# EAGLE board Wifi Gas Sensor (EAGLE 8.6.1)
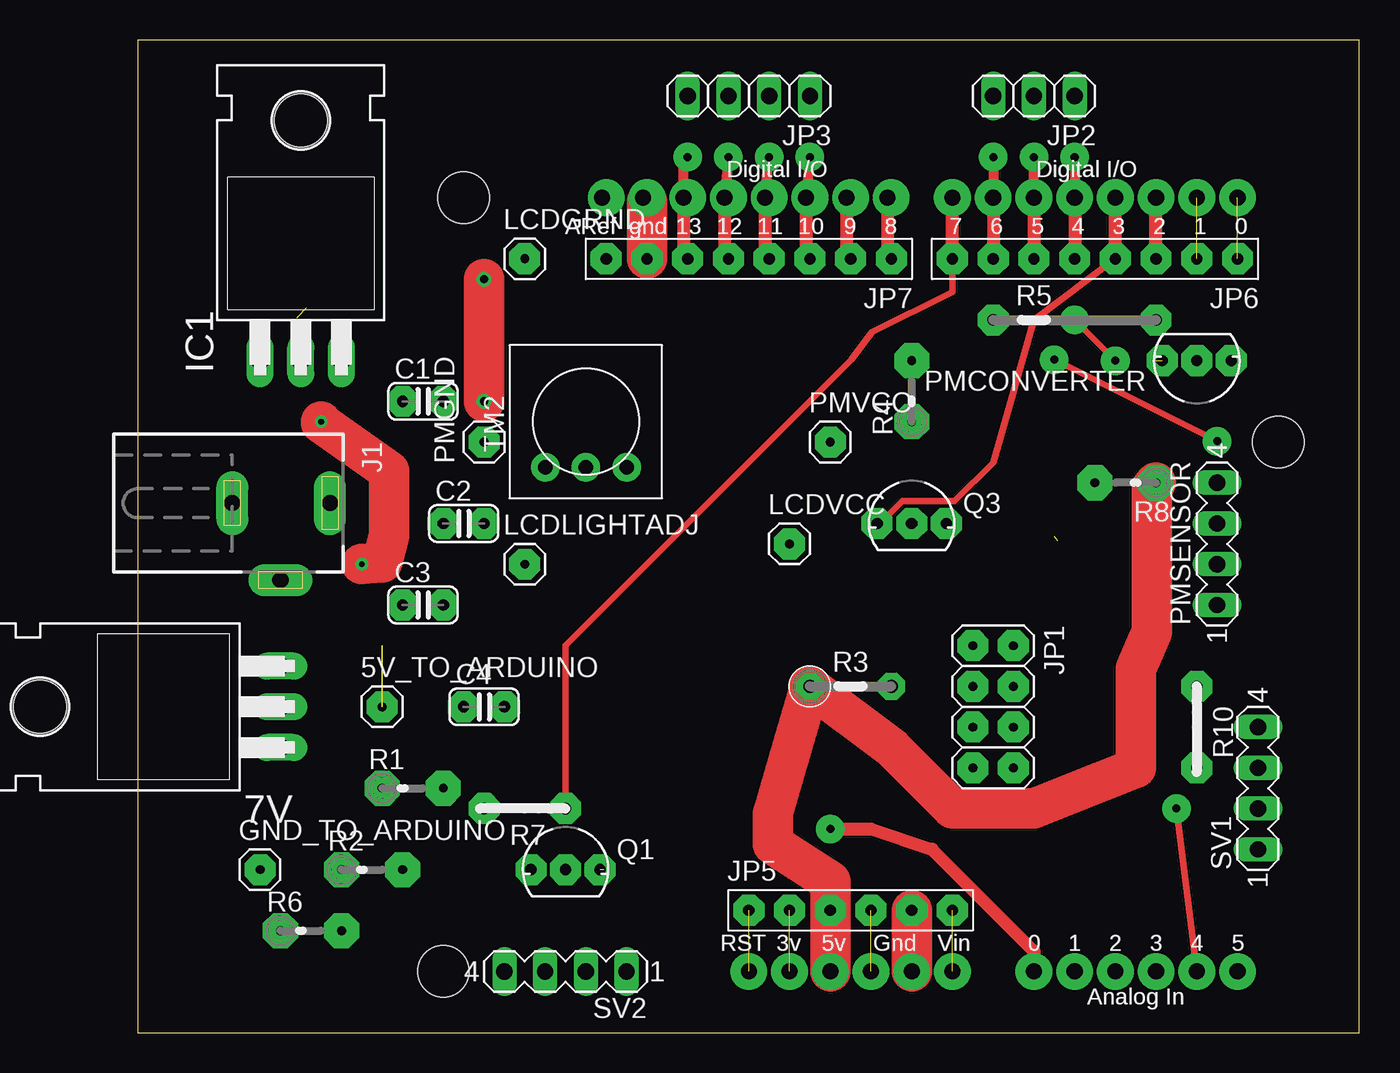
[diagram p0: board, top side]
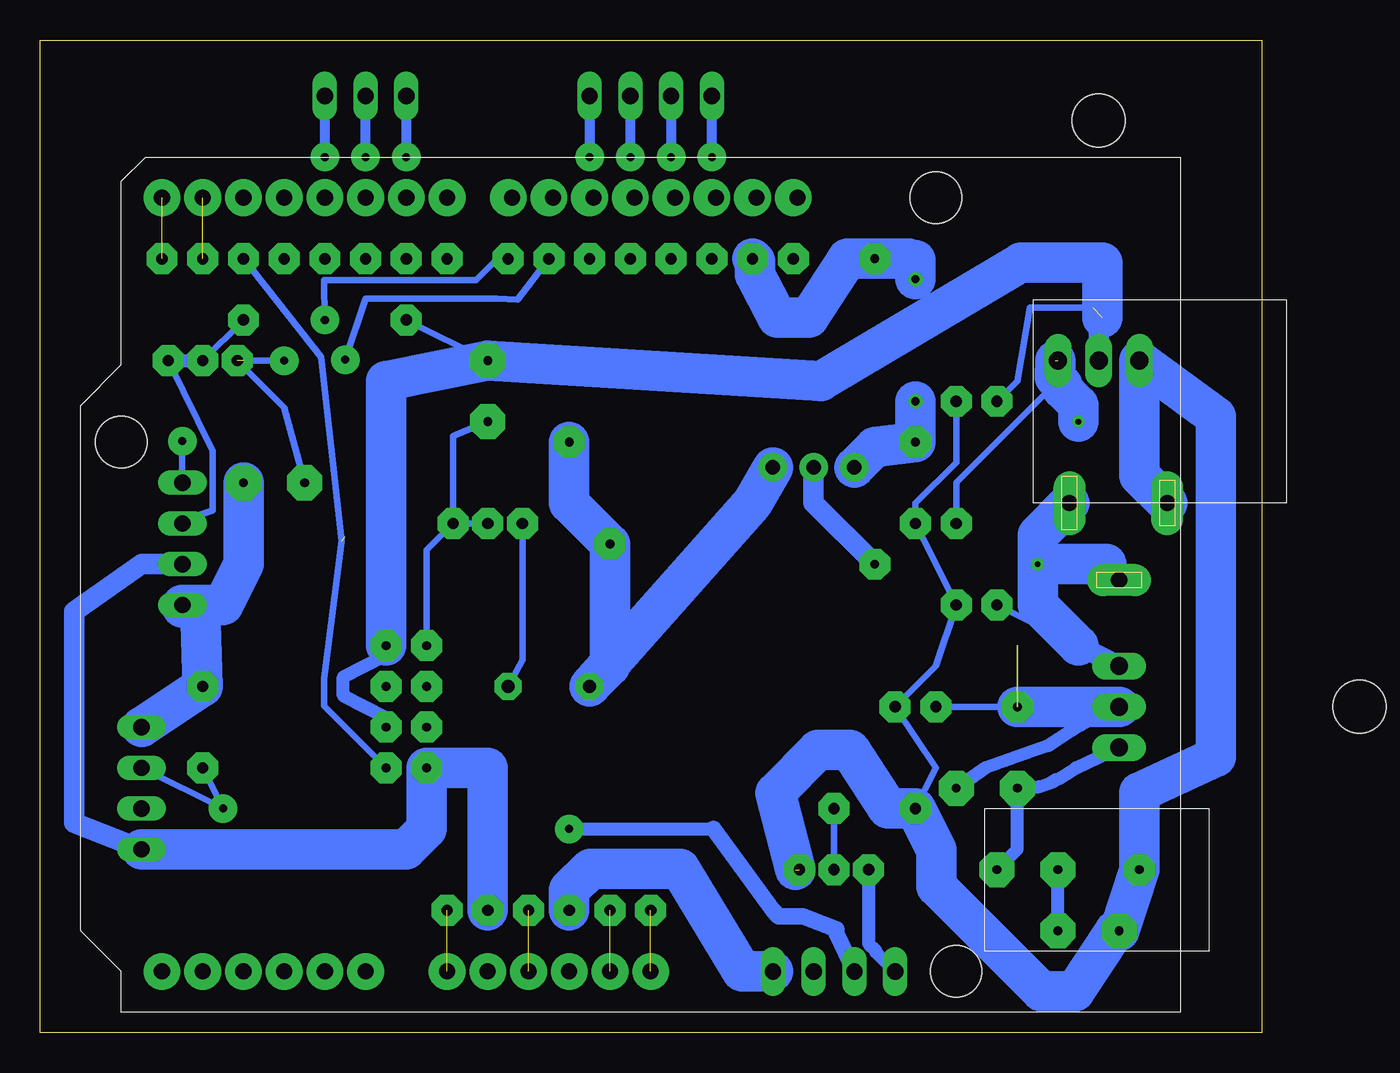
[diagram p1: board, bottom side, seen from below]

Size 76.18 x 61.9 mm. Coordinates in mm from the lower left corner, seen from the top.
Outline: 0,0 76.18,0 76.18,61.9 0,61.9 0,0
Copper layers (1*16): Top 0.035mm / dielectric 1.5mm / Bottom 0.035mm
Design rules "default": minimum track width 6mil, minimum drill 0.35mm, track to track 6mil, track to pad 6mil, pad to pad 6mil, via to via 6mil, smd to smd 6mil, copper to edge 40mil, drill to drill 6mil, minimum pad ring 10mil, minimum via ring 8mil, stop-mask expansion 4mil, vias tented up to drill 0mil, thermal gap 10mil

## Footprints (pad centres in the part's own frame; a part is rotated, then mirrored left to right if it is on the bottom)
1X01 = drill 0.55 pad 1.93 octagon: 1 0,0
TO220H = drill 1.118 long: 1 -2.54,-10.16; 2 0,-10.16; 3 2.54,-10.16 | hole 3.302: 0,4.826
C025-024X044 = drill 0.7 pad 1.93 octagon: 1 -1.27,0; 2 1.27,0
DCJ0202 = drill 1 pad 2 long: 1 0,3.1; 2 4.8,0; 3 0,-3
2X04 = drill 0.55 pad 1.93 octagon: 1 -3.81,-1.27; 2 -3.81,1.27; 3 -1.27,-1.27; 4 -1.27,1.27; 5 1.27,-1.27; 6 1.27,1.27; 7 3.81,-1.27; 8 3.81,1.27
1X03 = drill 1.016 long: 1 -2.54,0; 2 0,0; 3 2.54,0
1X04 = drill 1.016 long: 1 -3.81,0; 2 -1.27,0; 3 1.27,0; 4 3.81,0
1X06-BIG = drill 0.7 pad 1.93 octagon: 1 -6.35,0; 2 -3.81,0; 3 -1.27,0; 4 1.27,0; 5 3.81,0; 6 6.35,0
1X08-BIG = drill 0.7 pad 1.93 octagon: 1 -8.89,0; 2 -6.35,0; 3 -3.81,0; 4 -1.27,0; 5 1.27,0; 6 3.81,0; 7 6.35,0; 8 8.89,0
TO92-INLINE = drill 0.7 pad 1.93 octagon: 1 -2.159,0; 2 0,0; 3 2.159,0
MA04-1 = drill 1.016 long: 1 -3.81,0; 2 -1.27,0; 3 1.27,0; 4 3.81,0
0204V = drill 0.55 pad 2.184 octagon: 1 -1.27,0; 2 2.54,0
0207/5V = drill 0.813 pad 1.676 octagon: 1 -2.54,0; 2 2.54,0
0207/5V' = drill 0.7 pad 1.93 octagon: 1 -2.54,0; 2 7.62,0
0207/2V = drill 0.7 pad 1.93 octagon: 1 -1.27,0; 2 3.81,0
TRIM-3386 = drill 0.9 pad 1.778: 1 -2.54,-2.857; 2 0,-2.857; 3 2.54,-2.857
ADAFRUITUSER_ARDUINO-BPLACE = drill 1 pad 1.676 octagon: 3V 35.56,2.54; 5V 38.1,2.54; A0 50.8,2.54; A1 53.34,2.54; A2 55.88,2.54; A3 58.42,2.54; A4 60.96,2.54; A5 63.5,2.54; AREF 23.876,50.8; D0 63.5,50.8; D1 60.96,50.8; D2 58.42,50.8; D3 55.88,50.8; D4 53.34,50.8; D5 50.8,50.8; D6 48.26,50.8; D7 45.72,50.8; D8 41.656,50.8; D9 39.116,50.8; D10 36.576,50.8; D11 34.036,50.8; D12 31.496,50.8; D13 28.956,50.8; GND 26.416,50.8; GND1 43.18,2.54; GND2 40.64,2.54; RESET 33.02,2.54; VIN 45.72,2.54 | hole 3.2: 15.24,50.8; 66.04,35.56; 13.97,2.54; 15.24,50.8; 66.04,35.56; 13.97,2.54

## Placement (x,y rotation side)
5V_TO_ARDUINO  [1X01]  15.24,20.32 0 top
7V  317T  [TO220H]  -1.27,20.32 90 top
C1  [C025-024X044]  17.78,39.37 0 top
C2  [C025-024X044]  20.32,31.75 0 top
C3  [C025-024X044]  17.78,26.67 0 top
C4  [C025-024X044]  21.59,20.32 0 top
GND_TO_ARDUINO  [1X01]  7.62,10.16 0 top
IC1  7805T  [TO220H]  10.16,52.07 0 top
J1  DCJ0202  [DCJ0202]  8.89,33.02 270 top
JP1  [2X04]  53.34,20.32 270 top
JP2  [1X03]  55.88,58.42 180 top
JP3  [1X04]  38.1,58.42 180 top
JP5  [1X06-BIG]  44.45,7.62 0 top
JP6  [1X08-BIG]  59.69,48.26 180 top
JP7  [1X08-BIG]  38.1,48.26 180 top
LCDGRND  [1X01]  24.13,48.26 0 top
LCDLIGHTADJ  [1X01]  24.13,29.21 0 top
LCDVCC  [1X01]  40.64,30.48 0 top
PMCONVERTER  FQN1N50CI  [TO92-INLINE]  66.04,41.91 180 top
PMGND  [1X01]  21.59,36.83 90 top
PMSENSOR  [MA04-1]  67.31,30.48 90 top
PMVCC  [1X01]  43.18,36.83 0 top
Q1  FQN1N50CI  [TO92-INLINE]  26.67,10.16 0 top
Q3  FQN1N50CI  [TO92-INLINE]  48.26,31.75 0 top
R1  [0204V]  16.51,15.24 0 top
R2  [0204V]  13.97,10.16 0 top
R3  [0207/5V]  44.45,21.59 0 top
R4  [0204V]  48.26,39.37 90 top
R5  [0207/5V']  55.88,44.45 0 top
R6  [0204V]  10.16,6.35 0 top
R7  [0207/2V]  25.4,13.97 180 top
R8  [0204V]  62.23,34.29 180 top
R10  [0207/2V]  66.04,20.32 270 top
SV1  [MA04-1]  69.85,15.24 90 top
SV2  [MA04-1]  26.67,3.81 180 top
TM2  [TRIM-3386]  27.94,38.1 0 top
U$2  ADAFRUITUSER_ARDUINO-BPLACE  [ADAFRUITUSER_ARDUINO-BPLACE]  5.08,1.27 0 top

## Library data of the parts
5V_TO_ARDUINO GND_TO_ARDUINO JP1 LCDGRND LCDLIGHTADJ LCDVCC PMGND PMVCC = pinheadUSER
7V = linear
C1-C4 JP5-JP7 PMCONVERTER Q1 Q3 R3 = adafruitUSER
IC1 TM2 = adafruit
J1 = con-jack; OC_FARNELL: unknown; OC_NEWARK: unknown
JP2 JP3 = pinhead
PMSENSOR SV1 SV2 = con-lstb; OC_FARNELL: unknown; OC_NEWARK: unknown
R1 R2 R4-R8 R10 = resistorUSER
U$2 = Wifi Gas Sensor

## Nets
GND_TO_ARDUINO: C1.2 C2.2 C3.2 C4.2 GND_TO_ARDUINO.1 IC1.1 J1.3 Q1.3 R6.1 R7.2
N$1: 5V_TO_ARDUINO.1 7V.2 C4.1 R1.2
N$2: 7V.1 R1.1 R2.2
N$3: U$2.A5
N$4: JP2.1 JP6.5 U$2.D4
N$5: JP7.2 PMSENSOR.4 U$2.D9
N$6: JP6.4 Q3.1 R3.2 U$2.D3
N$7: JP2.2 JP6.6 U$2.D5
N$8: JP2.3 JP6.7 U$2.D6
N$9: JP3.4 JP7.6 U$2.D13
N$10: JP3.3 JP7.5 U$2.D12
N$11: JP3.2 JP7.4 U$2.D11
N$12: JP3.1 JP7.3 U$2.D10
N$13: SV2.3 U$2.A0
N$14: Q1.1 SV2.4
N$15: JP5.4 U$2.GND2
N$16: JP7.1 PMCONVERTER.3 R8.2 U$2.D8
N$17: JP1.7 JP5.5 PMSENSOR.2 SV1.1 U$2.GND1
N$18: R2.1 R6.2
N$19: 7V.3 C2.1 C3.1 IC1.3 J1.1
N$20: JP6.8 Q1.2 R7.1 U$2.D7
N$21: JP5.3 LCDVCC.1 PMSENSOR.1 PMVCC.1 R3.1 R8.1 R10.1 SV1.4 SV2.1 TM2.3 U$2.5V
N$22: U$2.A3
N$23: U$2.A2
N$24: U$2.A1
N$25: JP5.6 U$2.VIN
N$26: JP1.8 JP6.3 U$2.D2
N$27: C1.1 IC1.2 JP1.2 JP1.6 R4.2 R5.1
N$28: JP5.2 U$2.3V
N$29: JP5.1 U$2.RESET
N$30: JP6.1 U$2.D0
N$31: JP6.2 U$2.D1
N$32: JP7.7 LCDGRND.1 PMGND.1 TM2.1 U$2.GND
N$34: LCDLIGHTADJ.1 TM2.2
N$35: R10.2 SV1.3 U$2.A4
N$36: JP1.1 Q3.2 Q3.3 R4.1
N$37: PMCONVERTER.1 PMCONVERTER.2 PMSENSOR.3 R5.2

## Tracks (layer width: path | path; a pad name or v marks a point on that pad's centre or on a via)
GND_TO_ARDUINO  (1 unrouted)
  Bottom 0.406: R7.2 20.32,16.51 C4.2 20.32,22.86 C3.2 C2.2 21.59,33.02 19.05,35.56 C1.2
  Bottom 2.54: 29.06,10.16 30.33,14.96 27.66,17.63 25.68,17.63 23.29,13.97 R7.2 20.3,11.4 20.3,9.12 13.74,2.56 11.66,2.56 9.14,6.35 R6.1 GND_TO_ARDUINO.1 7.62,14.97 2.85,17.2 2.85,38.41 IC1.1 7.62,34.75 J1.3
N$1  (via drill 0.35)  (2 unrouted)
  Bottom 0.406: 5V_TO_ARDUINO.1 C4.1
  Bottom 0.813: 7V.2 11.3,19.18 13.28,17.91 17.22,16.51 R1.2
  Bottom 2.54: 5V_TO_ARDUINO.1 7V.2
  other vias: 15.24,20.32
N$2
  Bottom 0.813: R2.2 15.24,11.43 R1.1 13.88,15.33 13.09,15.61 12.85,15.76 12.58,15.86 11.57,16.51 7V.1
N$4  (via drill 0.35)
  Top 0.61: v58.42,54.61 U$2.D4
  Top 0.813: U$2.D4 JP6.5
  Bottom 0.61: JP2.1 v58.42,54.61
N$5  (via drill 0.5 pad 1.78)
  Top 0.406: v57.15,41.96 v67.31,36.88
  Top 0.813: U$2.D9 44.2,48.51 JP7.2
  Bottom 0.152: 44.45,51.82 U$2.D9
  Bottom 0.406: 45.23,48.26 JP7.2 46.39,45.72 47.71,45.77 55.88,45.77 v57.15,41.96 | v67.31,36.88 PMSENSOR.4
N$6
  Top 0.406: 46.28,31.75 47.68,33.15 50.93,33.15 53.34,35.56 55.88,44.45 JP6.4
  Top 0.813: Q3.1 46.28,31.75 | JP6.4 U$2.D3
  Bottom 0.406: Q3.1 46.1,23.24 R3.2
N$7  (via drill 0.35)
  Top 0.61: U$2.D5 v55.88,54.61
  Top 0.813: U$2.D5 JP6.6
  Bottom 0.61: v55.88,54.61 JP2.2
N$8  (via drill 0.35)
  Top 0.61: v53.34,54.61 U$2.D6
  Top 0.813: U$2.D6 JP6.7
  Bottom 0.61: JP2.3 v53.34,54.61
N$9  (via drill 0.35)
  Top 0.61: U$2.D13 34.04,54.36 v34.29,54.61
  Top 0.813: U$2.D13 34.04,48.51 JP7.6
  Bottom 0.152: 34.29,51.82 U$2.D13
  Bottom 0.61: v34.29,54.61 JP3.4
N$10  (via drill 0.35)
  Top 0.61: v36.83,54.61 U$2.D12
  Top 0.813: U$2.D12 36.58,48.51 JP7.5
  Bottom 0.152: 36.83,51.82 U$2.D12
  Bottom 0.61: JP3.3 v36.83,54.61
N$11  (via drill 0.35)
  Top 0.61: U$2.D11 v39.37,54.61
  Top 0.813: U$2.D11 39.12,48.51 JP7.4
  Bottom 0.152: 39.37,51.82 U$2.D11
  Bottom 0.61: v39.37,54.61 JP3.2
N$12  (via drill 0.35)
  Top 0.61: v41.91,54.61 U$2.D10
  Top 0.813: U$2.D10 41.66,48.51 JP7.3
  Bottom 0.152: 41.91,51.82 U$2.D10
  Bottom 0.61: JP3.1 v41.91,54.61
N$13  (via drill 0.35, 0.5 pad 0.7)
  Top 0.813: v43.18,12.7 45.72,12.7 49.53,11.43 55.88,5.08 U$2.A0
  Bottom 0.813: v43.18,12.7 34.2,12.7
  Bottom 1.016: 34.2,12.7 30.48,7.62 30.12,7.26 28.62,7.26 26.52,6.43 26.52,6.2 SV2.3
N$14
  Bottom 0.813: Q1.1 24.51,5.55 24.08,5.12 24.08,5.03 SV2.4
N$15  (1 unrouted)
N$16  (via drill 0.5 pad 1.78)  (1 unrouted)
  Top 0.406: v58.42,44.45 v60.96,41.91
  Top 0.813: U$2.D8 46.74,48.51 JP7.1
  Bottom 0.152: 46.99,51.82 U$2.D8
  Bottom 0.406: R8.2 60.96,38.99 PMCONVERTER.3 v60.96,41.91 | v58.42,44.45 58.47,46.94 48.98,46.94 47.66,48.26 JP7.1
N$17
  Top 0.813: 47.59,7.62 JP5.5
  Top 2.54: JP5.5 U$2.GND1
  Bottom 1.27: PMSENSOR.2 69.85,29.21 74.07,26.26 74.07,13.06 SV1.1
  Bottom 2.54: JP5.5 48.26,16.51 JP1.7 52.07,12.7 53.34,11.43 SV1.1
N$18
  Bottom 0.813: R6.2 R2.1
N$19  (via drill 0.35)  (1 unrouted)
  Top 2.54: v13.97,29.21 15.24,29.3 15.68,31.02 15.68,35.02 11.43,38.01 v11.43,38.1
  Bottom 0.406: 11.43,24.13 C3.1 | 12.85,41.92 12.85,41.76 | C2.1 19.05,34.29 12.89,40.45 12.89,40.9
  Bottom 1.27: 7V.3 11.43,24.13
  Bottom 2.54: 12.85,40.85 12.89,40.9 | v11.43,38.1 11.43,39.15 12.42,40.14 12.42,40.39 12.89,40.9 | 12.89,40.9 12.85,41.92 | 9.7,29.21 v13.97,29.21 | v13.97,29.21 13.97,26.67 11.43,24.13 | J1.1 13.97,31.04 v13.97,29.21
N$20
  Top 0.406: JP6.8 50.8,46.17 45.77,43.69 44.5,41.96 26.67,24.13 R7.1
  Top 0.813: JP6.8 U$2.D7
  Bottom 0.406: R7.1 Q1.2
N$21
  Top 2.54: U$2.5V JP5.3 43.18,9.43 39.6,11.74 39.6,13.66 40.64,17.24 R3.1 46.99,17.78 50.8,13.97 55.88,13.97 62.23,16.51 62.23,22.69 63.25,24.98 63.25,34.04 R8.1
  Bottom 2.54: SV2.1 32.42,3.81 36.28,10.21 41.86,10.21 43.18,8.89 JP5.3 | TM2.3 31.75,33.02 R3.1 40.64,22.86 LCDVCC.1 43.18,33.02 PMVCC.1 | 66.04,26.67 64.77,26.67 63.5,29.21 R8.1 | 66.04,26.67 PMSENSOR.1 | SV1.4 R10.1 66.2,26.52 | 67.31,26.52 66.2,26.52 | 66.2,26.52 66.04,26.67
N$25  (1 unrouted)
N$26  (1 unrouted)
  Top 0.813: JP6.3 U$2.D2
  Bottom 0.406: JP1.8 58.47,20.37 58.47,22.09 57.37,30.65 58.64,42.13 JP6.3
N$27  (1 unrouted)
  Bottom 0.406: R5.1 R4.2 | C1.1 15.23,40.64 14.46,45.21 10.52,45.21 | 10.17,41.91 IC1.2
  Bottom 0.813: JP1.6 54.61,19.61 57.28,21.01 57.28,22.17 54.61,23.57 JP1.2
  Bottom 1.27: 9.93,44.58 10.16,44.35 IC1.2
  Bottom 2.54: JP1.2 54.61,40.64 R4.2 27.48,40.64 15.01,48.03 9.93,48.03 9.93,44.58
N$28  (1 unrouted)
N$29  (1 unrouted)
N$30  (1 unrouted)
N$31  (1 unrouted)
N$32  (via drill 0.5, 0.5 pad 0.6)
  Top 0.813: U$2.GND 31.75,51.82
  Top 2.54: 31.75,51.82 JP7.7 | v21.59,46.99 v21.59,39.37
  Bottom 2.54: TM2.1 24.13,36.51 PMGND.1 v21.59,39.37 | JP7.7 31.6,48.11 31.6,47.27 30.2,44.6 28.22,44.6 25.83,48.26 LCDGRND.1 22.01,48.26 21.93,48.18 21.59,48.18 v21.59,46.99
N$33  (via drill 0.5 pad 1.78)
  other vias: 34.29,54.61
N$34
  Bottom 1.27: TM2.2 27.94,33.02 LCDLIGHTADJ.1
N$35  (via drill 0.35, 0.5 pad 1.78)
  Top 0.406: v64.77,13.97 U$2.A4
  Bottom 0.406: SV1.3 v64.77,13.97 R10.2
N$36
  Bottom 0.406: R4.1 50.42,37.21 Q3.3 | Q3.3 Q3.2 | Q3.3 52.07,30.1 JP1.1
N$37
  Bottom 0.406: 67.97,41.48 68.2,41.71 PMCONVERTER.1 65.43,36.26 65.43,32.56 67.31,31.95 PMSENSOR.3 | R5.2 PMCONVERTER.2
  Bottom 0.813: PMCONVERTER.1 PMCONVERTER.2
N$38  (via drill 0.5 pad 1.78)
  other vias: 43.18,12.7
N$39  (via drill 0.5 pad 1.78)
  other vias: 48.26,7.62
N$40  (via drill 0.5 pad 1.78)
  other vias: 36.83,54.61
N$41  (via drill 0.5 pad 1.78)
  other vias: 39.37,54.61
N$42  (via drill 0.5 pad 1.78)
  other vias: 41.91,54.61
N$43  (via drill 0.5 pad 1.78)
  other vias: 53.34,54.61
N$44  (via drill 0.5 pad 1.78)
  other vias: 55.88,54.61
N$45  (via drill 0.5 pad 1.78)
  other vias: 58.42,54.61
N$46  (via drill 0.5 pad 2.03)
  other vias: 68.58,52.07
N$47  (via drill 0.5 pad 1.78)
  other vias: 66.04,52.07
N$48  (via drill 0.5 pad 1.78)
  other vias: 63.5,52.07
N$49  (via drill 0.5 pad 1.78)
  other vias: 60.96,52.07
N$50  (via drill 0.5 pad 1.78)
  other vias: 58.42,52.07
N$51  (via drill 0.5 pad 1.78)
  other vias: 55.88,52.07
N$52  (via drill 0.5 pad 1.78)
  other vias: 53.34,52.07
N$53  (via drill 0.5 pad 1.78)
  other vias: 50.8,52.07
N$54  (via drill 0.5 pad 1.78)
  other vias: 46.99,52.07
N$55  (via drill 0.5 pad 1.78)
  other vias: 44.45,52.07
N$56  (via drill 0.5 pad 1.78)
  other vias: 41.91,52.07
N$57  (via drill 0.5 pad 1.78)
  other vias: 39.37,52.07
N$58  (via drill 0.5 pad 1.78)
  other vias: 36.83,52.07
N$59  (via drill 0.5 pad 1.78)
  other vias: 34.29,52.07
N$60  (via drill 0.5 pad 1.78)
  other vias: 68.58,3.81
N$61  (via drill 0.5 pad 1.78)
  other vias: 66.04,3.81
N$62  (via drill 0.5 pad 1.78)
  other vias: 63.5,3.81
N$63  (via drill 0.5 pad 1.78)
  other vias: 60.96,3.81
N$64  (via drill 0.5 pad 1.78)
  other vias: 58.42,3.81
N$65  (via drill 0.5 pad 1.78)
  other vias: 55.88,3.81
N$66  (via drill 0.5 pad 1.78)
  other vias: 50.8,3.81
N$67  (via drill 0.5 pad 1.78)
  other vias: 48.26,3.81
N$68  (via drill 0.5 pad 1.78)
  other vias: 45.72,3.81
N$69  (via drill 0.5 pad 1.78)
  other vias: 43.18,3.81
N$70  (via drill 0.5 pad 1.78)
  other vias: 40.64,3.81
N$71  (via drill 0.5 pad 1.78)
  other vias: 38.1,3.81
N$72  (via drill 0.5 pad 2.03)
  other vias: 66.04,52.07
N$73  (via drill 0.5 pad 2.03)
  other vias: 63.5,52.07
N$74  (via drill 0.5 pad 2.03)
  other vias: 60.96,52.07
N$75  (via drill 0.5 pad 2.03)
  other vias: 58.42,52.07
N$76  (via drill 0.5 pad 2.03)
  other vias: 55.88,52.07
N$77  (via drill 0.5 pad 2.03)
  other vias: 53.34,52.07
N$78  (via drill 0.5 pad 2.03)
  other vias: 50.8,52.07
N$79  (via drill 0.5 pad 2.03)
  other vias: 46.99,52.07
N$80  (via drill 0.5 pad 2.03)
  other vias: 44.45,52.07
N$81  (via drill 0.5 pad 2.03)
  other vias: 41.91,52.07
N$82  (via drill 0.5 pad 2.03)
  other vias: 39.37,52.07
N$83  (via drill 0.5 pad 2.03)
  other vias: 36.83,52.07
N$84  (via drill 0.5 pad 2.03)
  other vias: 34.29,52.07
N$85  (via drill 0.5 pad 2.03)
  other vias: 68.58,3.81
N$86  (via drill 0.5 pad 2.03)
  other vias: 66.04,3.81
N$87  (via drill 0.5 pad 2.03)
  other vias: 63.5,3.81
N$88  (via drill 0.5 pad 2.03)
  other vias: 60.96,3.81
N$89  (via drill 0.5 pad 2.29)
  other vias: 58.42,3.81
N$90  (via drill 0.5 pad 2.03)
  other vias: 55.88,3.81
N$91  (via drill 0.5 pad 2.29)
  other vias: 60.96,3.81
N$92  (via drill 0.5 pad 2.29)
  other vias: 63.5,3.81
N$93  (via drill 0.5 pad 2.29)
  other vias: 66.04,3.81
N$94  (via drill 0.5 pad 2.29)
  other vias: 68.58,3.81
N$95  (via drill 0.5 pad 2.29)
  other vias: 55.88,3.81
N$96  (via drill 0.5 pad 2.29)
  other vias: 50.8,3.81
N$97  (via drill 0.5 pad 2.29)
  other vias: 48.26,3.81
N$98  (via drill 0.5 pad 2.29)
  other vias: 45.72,3.81
N$99  (via drill 0.5 pad 2.29)
  other vias: 40.64,3.81
N$100  (via drill 0.5 pad 2.29)
  other vias: 43.18,3.81
N$101  (via drill 0.5 pad 2.29)
  other vias: 38.1,3.81
N$102  (via drill 0.5 pad 2.29)
  other vias: 68.58,52.07
N$103  (via drill 0.5 pad 2.29)
  other vias: 66.04,52.07
N$104  (via drill 0.5 pad 2.29)
  other vias: 63.5,52.07
N$105  (via drill 0.5 pad 2.29)
  other vias: 60.96,52.07
N$106  (via drill 0.5 pad 2.29)
  other vias: 58.42,52.07
N$107  (via drill 0.5 pad 2.29)
  other vias: 55.88,52.07
N$108  (via drill 0.5 pad 2.29)
  other vias: 53.34,52.07
N$109  (via drill 0.5 pad 2.29)
  other vias: 50.8,52.07
N$110  (via drill 0.5 pad 2.29)
  other vias: 46.99,52.07
N$111  (via drill 0.5 pad 2.29)
  other vias: 44.45,52.07
N$112  (via drill 0.5 pad 2.29)
  other vias: 41.91,52.07
N$113  (via drill 0.5 pad 2.29)
  other vias: 39.37,52.07
N$114  (via drill 0.5 pad 2.29)
  other vias: 36.83,52.07
N$115  (via drill 0.5 pad 2.29)
  other vias: 34.29,52.07
N$116  (via drill 0.5 pad 2.29)
  other vias: 31.75,52.07
N$117  (via drill 0.5 pad 2.29)
  other vias: 29.21,52.07